# EAGLE board CT_schematic (EAGLE 7.6.0)

Size 126.33 x 80 mm. Coordinates in mm from the lower left corner, seen from the top.
Outline: 26.33,0 126.33,0 126.33,80 26.33,80 26.33,0
Copper layers (1*16): Top 0.035mm / dielectric 1.5mm / Bottom 0.035mm
Design rules "default": minimum track width 10mil, minimum drill 24mil, track to track 8mil, track to pad 8mil, pad to pad 8mil, via to via 8mil, smd to smd 8mil, copper to edge 40mil, drill to drill 8mil, minimum pad ring 10mil, minimum via ring 8mil, stop-mask expansion 4mil, vias tented up to drill 0mil, thermal gap 10mil

## Footprints (pad centres in the part's own frame; a part is rotated, then mirrored left to right if it is on the bottom)
C0603 = smd 0.8 x 0.8: 1 -0.762,0; 2 0.762,0
C0805 = smd 1.2 x 1.3: 1 -1.016,0; 2 1.016,0
C0402 = smd 0.5 x 0.5: 1 -0.508,0; 2 0.508,0
C1210 = smd 1.2 x 2.5: 1 -1.524,0; 2 1.524,0
EXV-9H = smd 3.505 x 1.676: 1 -2.857,0; 2 2.857,0
PJ-037B_PACKAGE = drill 3.7 square: 1 12,0 | drill 3.2 square: 2 6,0
R0603 = smd 0.8 x 0.8: 1 -0.762,0; 2 0.762,0
WLCSP72 = smd 0.25 x 0.25: A1 -1.597,1.597; A2 -1.201,1.597; A3 -0.794,1.597; A4 -0.397,1.597; A5 0,1.597; A6 0.407,1.597; A7 0.804,1.588; A8 1.201,1.597; A9 1.607,1.597; B1 -1.597,1.201; B2 -1.201,1.201; B3 -0.794,1.201; B4 -0.397,1.201; B5 0,1.201; B6 0.407,1.201; B7 0.804,1.201; B8 1.201,1.201; B9 1.607,1.201; C1 -1.597,0.804; C2 -1.201,0.804; C3 -0.794,0.804; C4 -0.397,0.804; C5 0,0.804; C6 0.407,0.804; C7 0.804,0.804; C8 1.201,0.804; C9 1.607,0.804; D1 -1.597,0.397; D2 -1.201,0.397; D3 -0.794,0.397; D7 0.804,0.397; D8 1.201,0.397; D9 1.607,0.397; E1 -1.597,0; E2 -1.201,0; E3 -0.794,0; E7 0.804,0; E8 1.201,0; E9 1.607,0; F1 -1.597,-0.407; F2 -1.201,-0.407; F3 -0.794,-0.407; F7 0.804,-0.407; F8 1.201,-0.407; F9 1.607,-0.407; G1 -1.597,-0.804; G2 -1.201,-0.804; G3 -0.794,-0.804; G4 -0.397,-0.804; G5 0,-0.804; G6 0.407,-0.804; G7 0.804,-0.804; G8 1.201,-0.804; G9 1.607,-0.804; H1 -1.597,-1.201; H2 -1.201,-1.201; H3 -0.794,-1.201; H4 -0.397,-1.201; H5 0,-1.201; H6 0.407,-1.201; H7 0.804,-1.201; H8 1.201,-1.201; H9 1.607,-1.201; J1 -1.597,-1.607; J2 -1.201,-1.607; J3 -0.794,-1.607; J4 -0.397,-1.607; J5 0,-1.607; J6 0.407,-1.607; J7 0.804,-1.607; J8 1.201,-1.607; J9 1.607,-1.607
QFN-16 = smd 0.813 x 0.305: 1 -1.448,0.75; 2 -1.448,0.25; 3 -1.448,-0.25; 4 -1.448,-0.75; 9 1.448,-0.75; 10 1.448,-0.25; 11 1.448,0.25; 12 1.448,0.75 | smd 0.305 x 0.813: 5 -0.75,-1.448; 6 -0.25,-1.448; 7 0.25,-1.448; 8 0.75,-1.448; 13 0.75,1.448; 14 0.25,1.448; 15 -0.25,1.448; 16 -0.75,1.448 | smd 1.803 x 1.803: 17 0,0
TFBGA-153 = smd 0.3 x 0.3: A1 -3.25,3.25; A2 -2.75,3.25; A3 -2.25,3.25; A4 -1.75,3.25; A5 -1.25,3.25; A6 -0.75,3.25; A7 -0.25,3.25; A8 0.25,3.25; A9 0.75,3.25; A10 1.25,3.25; A11 1.75,3.25; A12 2.25,3.25; A13 2.75,3.25; A14 3.25,3.25; B1 -3.25,2.75; B2 -2.75,2.75; B3 -2.25,2.75; B4 -1.75,2.75; B5 -1.25,2.75; B6 -0.75,2.75; B7 -0.25,2.75; B8 0.25,2.75; B9 0.75,2.75; B10 1.25,2.75; B11 1.75,2.75; B12 2.25,2.75; B13 2.75,2.75; B14 3.25,2.75; C1 -3.25,2.25; C2 -2.75,2.25; C3 -2.25,2.25; C4 -1.75,2.25; C5 -1.25,2.25; C6 -0.75,2.25; C7 -0.25,2.25; C8 0.25,2.25; C9 0.75,2.25; C10 1.25,2.25; C11 1.75,2.25; C12 2.25,2.25; C13 2.75,2.25; C14 3.25,2.25; D1 -3.25,1.75; D2 -2.75,1.75; D3 -2.25,1.75; D4 -1.75,1.75; D12 2.25,1.75; D13 2.75,1.75; D14 3.25,1.75; E1 -3.25,1.25; E2 -2.75,1.25; E3 -2.25,1.25; E5 -1.25,1.25; E6 -0.75,1.25; E7 -0.25,1.25; E8 0.25,1.25; E9 0.75,1.25; E10 1.25,1.25; E12 2.25,1.25; E13 2.75,1.25; E14 3.25,1.25; F1 -3.25,0.75; F2 -2.75,0.75; F3 -2.25,0.75; F5 -1.25,0.75; F10 1.25,0.75; F12 2.25,0.75; F13 2.75,0.75; F14 3.25,0.75; G1 -3.25,0.25; G2 -2.75,0.25; G3 -2.25,0.25; G5 -1.25,0.25; G10 1.25,0.25; G12 2.25,0.25; G13 2.75,0.25; G14 3.25,0.25; H1 -3.25,-0.25; H2 -2.75,-0.25; H3 -2.25,-0.25; H5 -1.25,-0.25; H10 1.25,-0.25; H12 2.25,-0.25; H13 2.75,-0.25; H14 3.25,-0.25; J1 -3.25,-0.75; J2 -2.75,-0.75; J3 -2.25,-0.75; J5 -1.25,-0.75; J10 1.25,-0.75; J12 2.25,-0.75; J13 2.75,-0.75; J14 3.25,-0.75; K1 -3.25,-1.25; K2 -2.75,-1.25; K3 -2.25,-1.25; K5 -1.25,-1.25; K6 -0.75,-1.25; K7 -0.25,-1.25; K8 0.25,-1.25; K9 0.75,-1.25; K10 1.25,-1.25; K12 2.25,-1.25; K13 2.75,-1.25; K14 3.25,-1.25; L1 -3.25,-1.75; L2 -2.75,-1.75; L3 -2.25,-1.75; L12 2.25,-1.75; L13 2.75,-1.75; L14 3.25,-1.75; M1 -3.25,-2.25; M2 -2.75,-2.25; M3 -2.25,-2.25; M4 -1.75,-2.25; M5 -1.25,-2.25; M6 -0.75,-2.25; M7 -0.25,-2.25; M8 0.25,-2.25; M9 0.75,-2.25; M10 1.25,-2.25; M11 1.75,-2.25; M12 2.25,-2.25; M13 2.75,-2.25; M14 3.25,-2.25; N1 -3.25,-2.75; N2 -2.75,-2.75; N3 -2.25,-2.75; N4 -1.75,-2.75; N5 -1.25,-2.75; N6 -0.75,-2.75; N7 -0.25,-2.75; N8 0.25,-2.75; N9 0.75,-2.75; N10 1.25,-2.75; N11 1.75,-2.75; N12 2.25,-2.75; N13 2.75,-2.75; N14 3.25,-2.75; P1 -3.25,-3.25; P2 -2.75,-3.25; P3 -2.25,-3.25; P4 -1.75,-3.25; P5 -1.25,-3.25; P6 -0.75,-3.25; P7 -0.25,-3.25; P8 0.25,-3.25; P9 0.75,-3.25; P10 1.25,-3.25; P11 1.75,-3.25; P12 2.25,-3.25; P13 2.75,-3.25; P14 3.25,-3.25
WSON-8-PAD = smd 0.45 x 0.7: 1 -0.75,-0.95; 2 0.52,-0.95; 3 1.79,-0.95; 4 3.06,-0.95; 5 3.06,4.35; 6 1.79,4.35; 7 0.52,4.35; 8 -0.75,4.35 | smd 4 x 3.5: PAD 1.15,1.7
QFN-28 = smd 0.813 x 0.305: 1 -2.451,1.5; 2 -2.451,1; 3 -2.451,0.5; 4 -2.451,0; 5 -2.451,-0.5; 6 -2.451,-1; 7 -2.451,-1.5; 15 2.451,-1.5; 16 2.451,-1; 17 2.451,-0.5; 18 2.451,0; 19 2.451,0.5; 20 2.451,1; 21 2.451,1.5 | smd 0.305 x 0.813: 8 -1.5,-2.451; 9 -1,-2.451; 10 -0.5,-2.451; 11 0,-2.451; 12 0.5,-2.451; 13 1,-2.451; 14 1.5,-2.451; 22 1.5,2.451; 23 1,2.451; 24 0.5,2.451; 25 0,2.451; 26 -0.5,2.451; 27 -1,2.451; 28 -1.5,2.451 | smd 3.607 x 3.607: 29 0,0
SJ-43515TS-SMT-TR = smd 2.2 x 3: 1 0.6,-7.4; 4 3.4,-7.4 | smd 3 x 3: 2 12.8,-7.4; 5 17,-3 | smd 2 x 3: 3 5.3,0; 6 2.5,0 | drill 1.8: P$7 4.5,-3.69; P$8 11.54,-3.69
ABLS-12.288MHZ-B4-T = smd 5.6 x 2.8: 1 -3.81,0; 2 5.69,0
ASEK = smd 1.4 x 1: 1 -1.1,-0.8; 2 1.1,-0.8; 3 1.1,0.8; 4 -1.1,0.8
ASFL1 = smd 1.7 x 1.5: 1 -1.27,-1.1; 2 1.27,-1.1; 3 1.27,1.1; 4 -1.27,1.1
WSON-8 = smd 0.3 x 0.6: 1 -0.75,0; 2 0.05,0; 3 0.85,0; 4 1.65,0; 5 1.65,3.8; 6 0.85,3.8; 7 0.05,3.8; 8 -0.75,3.8 | smd 3 x 2.6: PAD 0.45,1.9
SON-6 = smd 0.55 x 0.3: 1 -0.355,0.5 | smd 0.52 x 0.3: 2 -0.37,0; 3 -0.37,-0.5; 4 0.37,-0.5; 5 0.37,0; 6 0.37,0.5
SW_4-1437565-2 = smd 1.4 x 2.1: 1 -2.23,4.55; 2 -2.23,-4.55; 3 2.23,4.55; 4 2.23,-4.55
LGM67K-G1J2-24-Z = smd 0.8 x 1.4: A -2,0; C 0,0
NC7SZ125M5X = smd 1.3 x 0.7: 1 -1.3,0.95; 2 -1.3,0; 3 -1.3,-0.95; 4 1.3,-0.95; 5 1.3,0.95

## Placement (x,y rotation side)
C1  1e-06  [C0603]  -33.36,74.93 0 top  (outside the outline)
C2  1e-07  [C0603]  -37.17,74.93 0 top  (outside the outline)
C3  1e-07  [C0603]  -40.98,74.93 0 top  (outside the outline)
C4  1e-07  [C0603]  -44.79,74.93 0 top  (outside the outline)
C5  1e-07  [C0603]  -48.6,74.93 0 top  (outside the outline)
C6  1e-07  [C0603]  11.09,80.01 0 top
C7  4.7e-06  [C0603]  -18.12,74.93 0 top  (outside the outline)
C8  1e-07  [C0603]  7.28,80.01 0 top
C9  1e-07  [C0603]  3.47,80.01 0 top
C10  1e-08  [C0603]  -0.34,80.01 0 top
C11  1e-06  [C0603]  -4.15,80.01 0 top  (outside the outline)
C12  4.7e-06  [C0805]  -7.96,63.5 0 top  (outside the outline)
C13  1e-07  [C0402]  -2.88,85.09 0 top  (outside the outline)
C14  1e-07  [C0402]  -6.69,85.09 0 top  (outside the outline)
C15  1e-07  [C0402]  -10.5,85.09 0 top  (outside the outline)
C16  2.2e-06  [C0603]  -21.93,74.93 0 top  (outside the outline)
C17  2.2e-06  [C0603]  -25.74,74.93 0 top  (outside the outline)
C18  1e-07  [C0402]  -14.31,85.09 0 top  (outside the outline)
C19  1e-07  [C0402]  -18.12,85.09 0 top  (outside the outline)
C20  2.2e-06  [C0603]  -29.55,74.93 0 top  (outside the outline)
C21  1e-06  [C0603]  -7.96,80.01 0 top  (outside the outline)
C22  2.2e-05  [C1210]  -30.82,55.88 0 top  (outside the outline)
C23  2.2e-05  [C1210]  -37.17,55.88 0 top  (outside the outline)
C24  1e-09  [C0402]  -21.93,85.09 0 top  (outside the outline)
C25  1e-09  [C0402]  -25.74,85.09 0 top  (outside the outline)
C26  1e-07  [C0402]  -29.55,85.09 0 top  (outside the outline)
C27  1e-07  [C0402]  -33.36,85.09 0 top  (outside the outline)
C28  1e-07  [C0402]  -37.17,85.09 0 top  (outside the outline)
C29  1e-07  [C0402]  -40.98,85.09 0 top  (outside the outline)
C30  1e-07  [C0402]  -44.79,85.09 0 top  (outside the outline)
C31  1e-05  [C0805]  -13.04,63.5 0 top  (outside the outline)
C32  1e-05  [C0805]  -18.12,63.5 0 top  (outside the outline)
C33  1e-05  [C0805]  -23.2,63.5 0 top  (outside the outline)
C34  1e-05  [C0805]  -28.28,63.5 0 top  (outside the outline)
C35  1e-05  [C0805]  -33.36,63.5 0 top  (outside the outline)
C36  2.2e-11  [C0402]  4.74,85.09 0 top  (outside the outline)
C37  2.2e-11  [C0402]  0.93,85.09 0 top  (outside the outline)
C38  1e-08  [C0402]  -48.6,85.09 0 top  (outside the outline)
C39  1e-08  [C0402]  -52.41,85.09 0 top  (outside the outline)
C40  1e-08  [C0402]  11.09,90.17 0 top  (outside the outline)
C41  1e-05  [C1210]  -43.52,55.88 0 top  (outside the outline)
C42  1e-05  [C1210]  -49.87,55.88 0 top  (outside the outline)
C43  1e-07  [C0402]  7.28,90.17 0 top  (outside the outline)
C44  0.0001  [EXV-9H]  -27.01,48.26 0 top  (outside the outline)
C45  0.0001  [EXV-9H]  -38.44,48.26 0 top  (outside the outline)
C46  1e-08  [C0402]  3.47,90.17 0 top  (outside the outline)
C47  1e-08  [C0402]  -0.34,90.17 0 top  (outside the outline)
C48  1e-08  [C0402]  -4.15,90.17 0 top  (outside the outline)
J1  PJ-037B  [PJ-037B_PACKAGE]  -29.55,25.4 0 top  (outside the outline)
R2  1000.0  [R0603]  -11.77,80.01 0 top  (outside the outline)
R4  4700.0  [R0603]  -15.58,80.01 0 top  (outside the outline)
R5  4700.0  [R0603]  -19.39,80.01 0 top  (outside the outline)
R6  4700.0  [R0603]  -23.2,80.01 0 top  (outside the outline)
R7  2200.0  [R0603]  -27.01,80.01 0 top  (outside the outline)
R8  2200.0  [R0603]  -30.82,80.01 0 top  (outside the outline)
R9  10000.0  [R0603]  11.09,69.85 0 top
R10  10000.0  [R0603]  6.01,69.85 0 top
R11  34000.0  [R0603]  0.93,69.85 0 top
R12  34000.0  [R0603]  -4.15,69.85 0 top  (outside the outline)
R13  34000.0  [R0603]  -9.23,69.85 0 top  (outside the outline)
R14  34000.0  [R0603]  -14.31,69.85 0 top  (outside the outline)
R15  34000.0  [R0603]  -19.39,69.85 0 top  (outside the outline)
R16  34000.0  [R0603]  -24.47,69.85 0 top  (outside the outline)
R17  34000.0  [R0603]  -29.55,69.85 0 top  (outside the outline)
R18  34000.0  [R0603]  -34.63,69.85 0 top  (outside the outline)
R19  34000.0  [R0603]  -39.71,69.85 0 top  (outside the outline)
R20  34000.0  [R0603]  -44.79,69.85 0 top  (outside the outline)
R21  10000.0  [R0603]  -49.87,69.85 0 top  (outside the outline)
R22  10000.0  [R0603]  11.09,74.93 0 top
R23  47000.0  [R0603]  6.01,74.93 0 top
R24  47000.0  [R0603]  0.93,74.93 0 top
R25  47000.0  [R0603]  -4.15,74.93 0 top  (outside the outline)
R26  680.0  [R0603]  -34.63,80.01 0 top  (outside the outline)
R27  100000.0  [R0603]  -38.44,63.5 0 top  (outside the outline)
R28  2231.0  [R0603]  -38.44,80.01 0 top  (outside the outline)
R29  1000.0  [R0603]  -42.25,80.01 0 top  (outside the outline)
R30  10000.0  [R0603]  -9.23,74.93 0 top  (outside the outline)
R31  10000.0  [R0603]  -14.31,74.93 0 top  (outside the outline)
R32  9100.0  [R0603]  -46.06,80.01 0 top  (outside the outline)
R33  680000.0  [R0603]  -43.52,63.5 0 top  (outside the outline)
R34  120000.0  [R0603]  -48.6,63.5 0 top  (outside the outline)
U1  STM32L486JGY6  [WLCSP72]  2.2,48.26 0 top
U2  MMA8451QT  [QFN-16]  11.09,85.09 0 top  (outside the outline)
U3  mtfc4gmcdm  [TFBGA-153]  6.01,8.89 0 top
U4  MX25R6435FZAIH0  [WSON-8-PAD]  -1.61,36.83 0 top
U5  WM8731CLSEFL  [QFN-28]  -23.2,55.88 0 top  (outside the outline)
U6  SJ-43515TS-SMT-TR  [SJ-43515TS-SMT-TR]  -27.01,10.16 0 top  (outside the outline)
U7  SJ-43515TS-SMT-TR  [SJ-43515TS-SMT-TR]  -13.04,26.67 0 top
U8  ABLS-12.288MHZ-B4-T  [ABLS-12.288MHZ-B4-T]  0.93,57.15 0 top
U9  ASEK-32.768KHz-ECST  [ASEK]  -18.12,48.26 0 top  (outside the outline)
U10  ASFL1-25MHZ-NCS  [ASFL1]  -38.44,36.83 0 top  (outside the outline)
U11  LP3878SDX-ADJ/NOPB  [WSON-8]  -21.93,35.56 0 top  (outside the outline)
U12  TPS3895ADRYR  [SON-6]  -6.69,88.9 0 top  (outside the outline)
U13  4-1437565-2  [SW_4-1437565-2]  -46.06,24.13 0 top  (outside the outline)
U14  Q65110A2395  [LGM67K-G1J2-24-Z]  -10.5,55.88 0 top  (outside the outline)
U15  nc7sz125m5x  [NC7SZ125M5X]  11.09,63.5 0 top
U16  nc7sz125m5x  [NC7SZ125M5X]  4.74,63.5 0 top
U17  nc7sz125m5x  [NC7SZ125M5X]  -1.61,63.5 0 top

## Library data of the parts
C1-C48 J1 R2 R4-R34 U1-U17 = circuit_tree

## Nets
CLK_CRYSTAL_U5_1: C36.1 U5.1 U8.1
CLK_CRYSTAL_U5_2: C37.1 U5.2 U8.2
CLK_U1_C9: U1.C9 U9.3
CLK_U1_D9: U1.D9 U10.3
GND: C1.2 C2.2 C3.2 C4.2 C5.2 C6.2 C7.2 C8.2 C9.2 C10.2 C11.2 C12.2 C13.2 C14.2 C15.2 C16.2 C17.2 C18.2 C19.2 C20.2 C21.2 C25.2 C26.2 C27.2 C28.2 C29.2 C30.2 C31.2 C32.2 C33.2 C34.2 C35.2 C36.2 C37.2 C38.2 C39.2 C40.2 C41.2 C42.2 C43.2 C44.2 C45.2 C46.2 C47.2 C48.2 J1.2 R2.2 R9.2 R23.2 R24.2 R25.2 R29.2 R32.2 R34.2 U1.A8 U1.B1 U1.G9 U1.J2 U1.J9 U2.5 U2.10 U2.12 U2.17 U3.C4 U3.E7 U3.G5 U3.H10 U3.K8 U3.N2 U3.N5 U3.P4 U3.P6 U4.4 U4.PAD U5.4 U5.15 U5.19 U5.25 U5.26 U5.29 U6.1 U7.1 U9.2 U10.2 U11.3 U11.PAD U12.2 U14.C U15.1 U15.3 U16.1 U16.3 U17.1 U17.3
NET_U1_A5: R7.1 U1.A5 U2.4
NET_U1_A7: R8.1 U1.A7 U2.6
NET_U1_D7: R9.1 U1.D7
NET_U1_E9: R6.1 U1.E9 U17.4
NET_U1_H9: C10.1 C11.1 U1.G8 U1.H9
NET_U1_J6: U14.A
NET_U1_J7: U13.3 U13.4
NET_U2_2: C14.1 U2.2
NET_U2_7: R10.1 U2.7
NET_U3_C2: C17.1 C18.1 U3.C2
NET_U3_K5: R4.1 U3.K5 U15.4
NET_U4_7: R5.1 U1.H5 U4.7 U16.4
NET_U5_9: U5.9
NET_U5_20: C30.1 C35.1 U5.20
NET_U6_2: C23.1 R24.1 U6.2
NET_U6_5: C22.1 R23.1 U6.5
NET_U6_13: C22.2
NET_U6_14: C23.2
NET_U7_5: C24.1 C25.1 R25.1 R26.1 U7.5
NET_U7_21: R26.2
NET_U7_22: C24.2
NET_U11_1: C40.1 U11.1
NET_U11_6: R28.2 R29.1 U11.6
NET_U11_8: R27.1 U11.8
NET_U12_1: R31.1 R32.1 U12.1
NET_U12_3: R33.2 R34.1 U12.3
NET_U12_4: R30.1 U12.4 U15.2 U16.2 U17.2
NET_U13_1: R2.1 U13.1 U13.2
PROC_QUADSPI_BK1_IO0: U1.J4 U4.5
PROC_QUADSPI_BK1_IO1: U1.J5 U4.2
PROC_QUADSPI_BK1_IO2: R22.1 U1.H4 U4.3
PROC_QUADSPI_CLK: U1.H3 U4.6
PROC_QUADSPI_NCS: R21.1 U1.G3 U4.1
PROC_SAI1_FS_B: U1.B7 U5.9 U5.11
PROC_SAI1_SCK_B: U1.A6 U5.7
PROC_SAI1_SD_B: U1.C7 U5.8
PROC_SDMMC1_CK: R20.1 U1.B3 U3.M6
PROC_SDMMC1_CMD: R19.1 U1.A3 U3.M5
PROC_SDMMC1_D0: R11.1 U1.F2 U3.A3
PROC_SDMMC1_D1: R12.1 U1.E1 U3.A4
PROC_SDMMC1_D2: R13.1 U1.D3 U3.A5
PROC_SDMMC1_D3: R14.1 U1.C3 U3.B2
PROC_SDMMC1_D4: R15.1 U1.E7 U3.B3
PROC_SDMMC1_D5: R16.1 U1.E8 U3.B4
PROC_SDMMC1_D6: R17.1 U1.F3 U3.B5
PROC_SDMMC1_D7: R18.1 U1.F1 U3.B6
VCC_S1_11V4: C41.1 C44.1 C45.1 J1.1 R27.2 U11.4
VCC_TIER1_3V3: C1.1 C2.1 C3.1 C4.1 C5.1 C6.1 C7.1 C8.1 C9.1 C12.1 C13.1 C15.1 C16.1 C19.1 C20.1 C21.1 C26.1 C27.1 C28.1 C29.1 C31.1 C32.1 C33.1 C34.1 C38.1 C39.1 C42.1 C43.1 C46.1 C47.1 C48.1 R4.2 R5.2 R6.2 R7.2 R8.2 R10.2 R11.2 R12.2 R13.2 R14.2 R15.2 R16.2 R17.2 R18.2 R19.2 R20.2 R21.2 R22.2 R28.1 R30.2 R31.2 R33.1 U1.A1 U1.A9 U1.B6 U1.B9 U1.J1 U1.J8 U2.1 U2.14 U3.C6 U3.E6 U3.F5 U3.J10 U3.K9 U3.M4 U3.N4 U3.P3 U3.P5 U4.8 U5.3 U5.5 U5.12 U5.18 U9.4 U10.4 U11.5 U12.6 U15.5 U16.5 U17.5

## Tracks (layer width: path | path; a pad name or v marks a point on that pad's centre or on a via)
CLK_CRYSTAL_U5_1  (2 unrouted)
CLK_CRYSTAL_U5_2  (2 unrouted)
CLK_U1_C9  (1 unrouted)
CLK_U1_D9  (1 unrouted)
GND  (93 unrouted)
NET_U1_A5  (2 unrouted)
NET_U1_A7  (2 unrouted)
NET_U1_D7  (1 unrouted)
NET_U1_E9  (2 unrouted)
NET_U1_H9  (3 unrouted)
NET_U1_J7  (1 unrouted)
NET_U2_2  (1 unrouted)
NET_U2_7  (1 unrouted)
NET_U3_C2  (2 unrouted)
NET_U3_K5  (2 unrouted)
NET_U4_7  (3 unrouted)
NET_U5_20  (2 unrouted)
NET_U6_2  (2 unrouted)
NET_U6_5  (2 unrouted)
NET_U7_5  (4 unrouted)
NET_U11_1  (1 unrouted)
NET_U11_6  (2 unrouted)
NET_U11_8  (1 unrouted)
NET_U12_1  (2 unrouted)
NET_U12_3  (2 unrouted)
NET_U12_4  (4 unrouted)
NET_U13_1  (2 unrouted)
PROC_QUADSPI_BK1_IO0  (1 unrouted)
PROC_QUADSPI_BK1_IO1  (1 unrouted)
PROC_QUADSPI_BK1_IO2  (2 unrouted)
PROC_QUADSPI_CLK  (1 unrouted)
PROC_QUADSPI_NCS  (2 unrouted)
PROC_SAI1_FS_B  (2 unrouted)
PROC_SAI1_SCK_B  (1 unrouted)
PROC_SAI1_SD_B  (1 unrouted)
PROC_SDMMC1_CK  (2 unrouted)
PROC_SDMMC1_CMD  (2 unrouted)
PROC_SDMMC1_D0  (2 unrouted)
PROC_SDMMC1_D1  (2 unrouted)
PROC_SDMMC1_D2  (2 unrouted)
PROC_SDMMC1_D3  (2 unrouted)
PROC_SDMMC1_D4  (2 unrouted)
PROC_SDMMC1_D5  (2 unrouted)
PROC_SDMMC1_D6  (2 unrouted)
PROC_SDMMC1_D7  (2 unrouted)
VCC_S1_11V4  (5 unrouted)
VCC_TIER1_3V3  (81 unrouted)